# EAGLE board xr_vco_components_route2 (EAGLE 7.3.0)
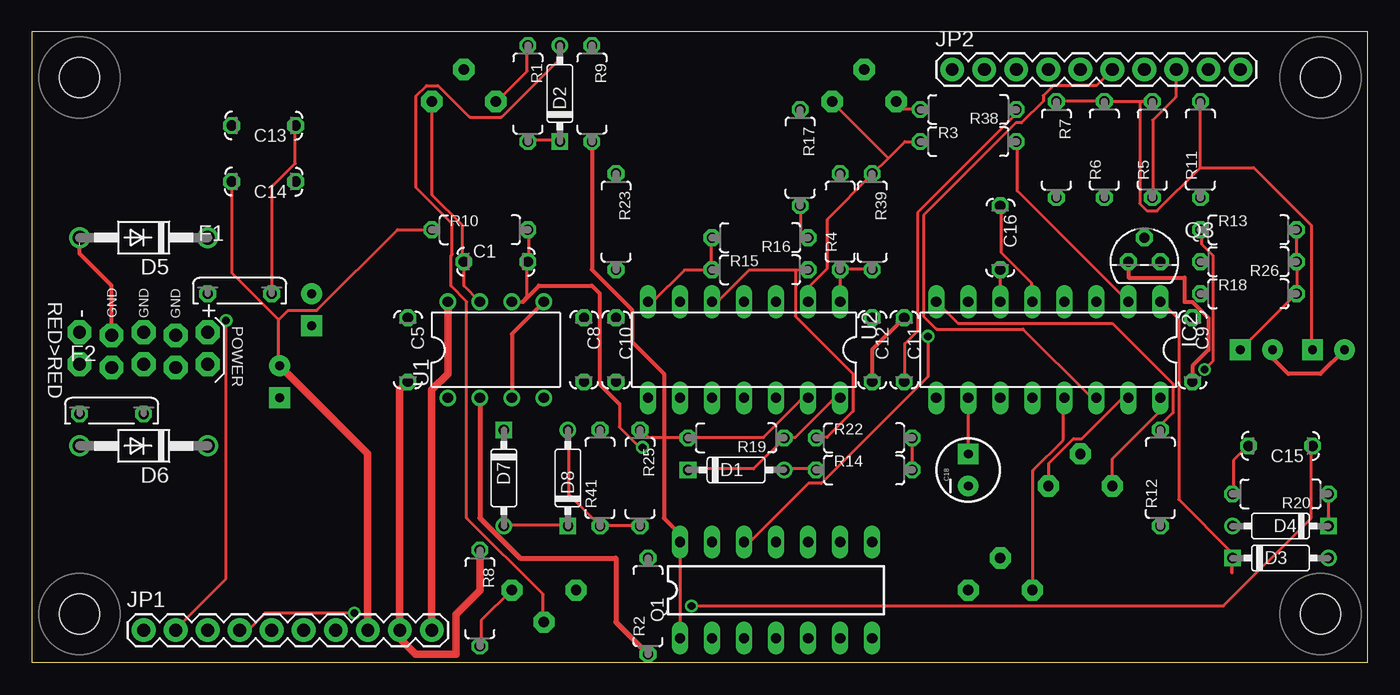
[diagram p0: board, top side]
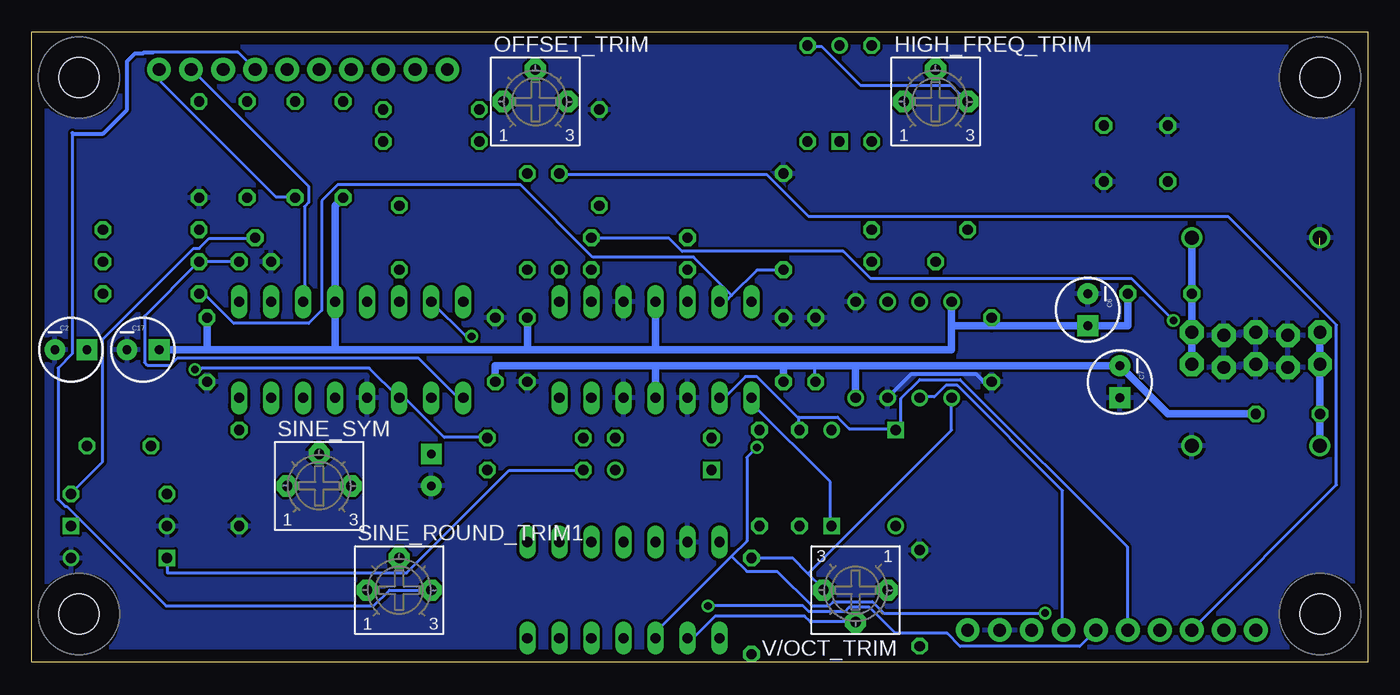
[diagram p1: board, bottom side, seen from below]

Size 106 x 50 mm. Coordinates in mm from the lower left corner, seen from the top.
Outline: 0,0 106,0 106,50 0,50 0,0
Copper layers (1*16): Top 0.035mm / dielectric 1.5mm / Bottom 0.035mm
Design rules "default": minimum track width 10mil, minimum drill 24mil, track to track 8mil, track to pad 8mil, pad to pad 8mil, via to via 8mil, smd to smd 8mil, copper to edge 40mil, drill to drill 8mil, minimum pad ring 10mil, minimum via ring 8mil, stop-mask expansion 4mil, vias tented up to drill 0mil, thermal gap 10mil
Net classes: 1 power: width 0.406 mm; 2 ground: width 0.305 mm

## Footprints (pad centres in the part's own frame; a part is rotated, then mirrored left to right if it is on the bottom)
C050-024X044 = drill 0.813 octagon: 1 -2.54,0; 2 2.54,0
CPOL-RADIAL-10UF-25V = drill 0.7 pad 1.651 square: 1 1.27,0 | drill 0.7 pad 1.651: 2 -1.27,0
DO35-7 = drill 0.813: A 3.81,0 | drill 0.813 square: C -3.81,0
DO41-10 = drill 1.118: A 5.08,0; C -5.08,0
C050H075X075 = drill 0.813 octagon: 1 -2.54,0; 2 2.54,0
BOURNS_3362P_TRIMMER = drill 0.813 pad 1.676 octagon: 1 -2.54,0; 2 0,2.54; 3 2.54,0
DIL16 = drill 0.813 long: 1 -8.89,-3.81; 2 -6.35,-3.81; 3 -3.81,-3.81; 4 -1.27,-3.81; 5 1.27,-3.81; 6 3.81,-3.81; 7 6.35,-3.81; 8 8.89,-3.81; 9 8.89,3.81; 10 6.35,3.81; 11 3.81,3.81; 12 1.27,3.81; 13 -1.27,3.81; 14 -3.81,3.81; 15 -6.35,3.81; 16 -8.89,3.81
1X10 = drill 1.016 pad 1.88: 1 0,0; 2 2.54,0; 3 5.08,0; 4 7.62,0; 5 10.16,0; 6 12.7,0; 7 15.24,0; 8 17.78,0; 9 20.32,0; 10 22.86,0
DIL14 = drill 0.813 long: 1 -7.62,-3.81; 2 -5.08,-3.81; 3 -2.54,-3.81; 4 0,-3.81; 5 2.54,-3.81; 6 5.08,-3.81; 7 7.62,-3.81; 8 7.62,3.81; 9 5.08,3.81; 10 2.54,3.81; 11 0,3.81; 12 -2.54,3.81; 13 -5.08,3.81; 14 -7.62,3.81
TO92D = drill 0.813 octagon: B 0,1.905; C 1.27,0; E -1.27,0
7MM_RESISTOR = drill 0.813 octagon: 1 -3.81,0; 2 3.81,0
EURO_PWR_HEADER_LOCK = drill 1.016 pad 1.88 octagon: GND1 -2.54,1.143; GND2 -2.54,-1.397; GND3 0,1.397; GND4 0,-1.143; GND5 2.54,1.143; GND6 2.54,-1.397; NEG1 -5.08,1.397; NEG2 -5.08,-1.143; POS1 5.08,1.397; POS2 5.08,-1.143
DIL08 = drill 0.813 pad 1.27: 1 -3.81,-3.81; 2 -1.27,-3.81; 3 1.27,-3.81; 4 3.81,-3.81; 5 3.81,3.81; 6 1.27,3.81; 7 -1.27,3.81; 8 -3.81,3.81
MOUNTING_HOLE = hole 3.2: 0,0

## Placement (x,y rotation side)
C1  100pf  [C050-024X044]  36.83,31.75 0 top
C2  10uf  [CPOL-RADIAL-10UF-25V]  102.87,24.77 0 bottom
C5  100n  [C050-024X044]  29.84,24.77 270 top
C6  10uf  [CPOL-RADIAL-10UF-25V]  22.23,27.94 270 bottom
C7  10uf  [CPOL-RADIAL-10UF-25V]  19.68,22.23 270 bottom
C8  100n  [C050-024X044]  43.81,24.77 270 top
C9  100n  [C050-024X044]  92.08,24.77 270 top
C10  100n  [C050-024X044]  46.35,24.77 270 top
C11  100n  [C050-024X044]  69.22,24.77 270 top
C12  100n  [C050-024X044]  66.67,24.77 270 top
C13  100n  [C050-024X044]  18.41,42.55 180 top
C14  100n  [C050-024X044]  18.41,38.1 180 top
C15  470pf  [C050-024X044]  99.06,17.14 180 top
C16  0.047uf  [C050-024X044]  76.83,33.66 270 top
C17  4.7uf  [CPOL-RADIAL-10UF-25V]  97.16,24.77 0 bottom
C18  4.7uf  [CPOL-RADIAL-10UF-25V]  74.3,15.24 90 top
D1  1N4148  [DO35-7]  55.88,15.24 0 top
D2  1N4148  [DO35-7]  41.91,45.09 90 top
D3  1N4148  [DO35-7]  99.06,8.26 0 top
D4  1N4148  [DO35-7]  99.06,10.79 180 top
D5  1N4001  [DO41-10]  8.89,33.66 180 top
D6  1N4001  [DO41-10]  8.89,17.14 180 top
D7  1N4148  [DO35-7]  37.47,14.61 270 top
D8  1N4148  [DO35-7]  42.55,14.61 90 top
F1  FUSE  [C050H075X075]  16.51,29.21 0 top
F2  FUSE  [C050H075X075]  6.35,19.68 0 top
HIGH_FREQ_TRIM  1M  [BOURNS_3362P_TRIMMER]  34.29,44.45 0 bottom
IC2  [DIL16]  80.64,24.77 180 top
JP1  M10"  [1X10]  8.89,2.54 0 top
JP2  M10"  [1X10]  73.03,46.99 0 top
OFFSET_TRIM  50k  [BOURNS_3362P_TRIMMER]  66.04,44.45 0 bottom
Q1  THAT300P  [DIL14]  59.05,5.71 0 top
Q3  2N3904  [TO92D]  88.27,31.75 0 top
R1  47k  [7MM_RESISTOR]  39.37,45.09 270 top
R2  2k  [7MM_RESISTOR]  48.9,4.45 90 top
R3  82k  [7MM_RESISTOR]  74.3,41.27 0 top
R4  1k  [7MM_RESISTOR]  64.14,34.92 90 top
R5  11k  [7MM_RESISTOR]  88.9,40.64 90 top
R6  20k  [7MM_RESISTOR]  85.09,40.64 90 top
R7  5.6k  [7MM_RESISTOR]  81.28,40.64 270 top
R8  390R  [7MM_RESISTOR]  35.56,5.08 270 top
R9  4.7k  [7MM_RESISTOR]  44.45,45.09 270 top
R10  1.2m  [7MM_RESISTOR]  35.56,34.29 0 top
R11  5.6k  [7MM_RESISTOR]  92.71,40.64 90 top
R12  1k  [7MM_RESISTOR]  89.53,14.61 90 top
R13  4.7k  [7MM_RESISTOR]  96.52,34.29 0 top
R14  10k  [7MM_RESISTOR]  66.04,15.24 0 top
R15  2.2M  [7MM_RESISTOR]  57.78,31.11 0 top
R16  3k  [7MM_RESISTOR]  57.78,33.66 180 top
R17  1.8k  [7MM_RESISTOR]  60.96,40.01 270 top
R18  10k  [7MM_RESISTOR]  96.52,29.21 0 top
R19  10k  [7MM_RESISTOR]  55.88,17.78 180 top
R20  100k  [7MM_RESISTOR]  99.06,13.34 180 top
R22  2.2k  [7MM_RESISTOR]  66.04,17.78 0 top
R23  10k  [7MM_RESISTOR]  46.35,34.92 270 top
R25  10k  [7MM_RESISTOR]  48.26,14.61 270 top
R26  4.7k  [7MM_RESISTOR]  96.52,31.75 180 top
R38  150k  [7MM_RESISTOR]  74.3,43.81 180 top
R39  200k  [7MM_RESISTOR]  66.67,34.92 270 top
R41  220k  [7MM_RESISTOR]  45.09,14.61 90 top
SINE_ROUND_TRIM1  500 Ohm  [BOURNS_3362P_TRIMMER]  76.83,5.71 0 bottom
SINE_SYM  25k  [BOURNS_3362P_TRIMMER]  83.19,13.97 0 bottom
SV1  EURO_POWER_HEADERLOCK_PADS  [EURO_PWR_HEADER_LOCK]  8.89,24.77 0 top
U1  LF442N  [DIL08]  36.83,24.77 0 top
U2  TL074P  [DIL14]  56.52,24.77 180 top
U$1  [MOUNTING_HOLE]  3.81,46.35 0 top
U$2  [MOUNTING_HOLE]  102.23,46.35 0 top
U$3  [MOUNTING_HOLE]  102.23,3.81 0 top
U$4  [MOUNTING_HOLE]  3.81,3.81 0 top
V/OCT_TRIM  100R  [BOURNS_3362P_TRIMMER]  40.64,5.71 180 bottom

## Library data of the parts
C1 C5 C8-C16 F1 F2 = TomW
C2 C6 C7 C17 C18 = SparkFun-Passives
D1-D4 D7 D8 HIGH_FREQ_TRIM OFFSET_TRIM R1-R20 R22 R23 R25 R26 R38 R39 R41 SINE_ROUND_TRIM1 SINE_SYM SV1 U$1-U$4 V/OCT_TRIM = MusicThingModular
D5 D6 = diode
IC2 = exar; OC_FARNELL: unknown; OC_NEWARK: unknown
JP1 JP2 = SparkFun-Connectors
Q1 = that-corp
Q3 = transistor-small-signal
U1 U2 = linear

## Nets
+12V: C5.1 C6.1 C9.1 C12.1 C13.1 C17.1 F1.2 IC2.4 JP1.10 R7.2 R13.2 R18.2 R26.1 U1.8 U2.4
+12V_INLET [power]: D5.C F1.1 SV1.POS1 SV1.POS2
-12V: C7.2 C8.2 C10.2 C11.2 C14.2 F2.2 JP1.8 R10.1 R38.1 U1.4 U2.11
-12V_INLET [power]: D6.A F2.1 SV1.NEG1 SV1.NEG2
CATH_D4: D1.C R19.1 U2.14
GND: C2.2 C5.2 C6.2 C7.1 C8.1 C9.2 C10.1 C11.1 C12.2 C13.2 C14.1 C17.2 C18.2 D3.A D4.A D5.A D6.C IC2.12 JP1.9 Q1.13 Q3.E R8.1 R11.1 R12.1 R17.1 R23.1 SINE_SYM.2 SV1.GND1 SV1.GND2 SV1.GND3 SV1.GND4 SV1.GND5 SV1.GND6 U1.3 U1.5 U2.3 U2.10 U2.12
LIN_FM_CV: C1.2 JP1.4 Q1.3 R10.2 U1.6
N$1: IC2.7 Q1.12
N$2: D2.C R1.2
N$3: HIGH_FREQ_TRIM.1 R1.1
N$5: IC2.2 R3.2
N$7: R2.2 U1.1 V/OCT_TRIM.3
N$8: OFFSET_TRIM.3 R3.1 R39.1 U2.2
N$9: R8.2 V/OCT_TRIM.1
N$10: D2.A Q1.2 V/OCT_TRIM.2
N$11: Q1.1 Q1.14 R9.2
N$12: OFFSET_TRIM.1 R38.2
N$13: R4.1 R39.2 U2.1
N$15: C1.1 HIGH_FREQ_TRIM.3 R9.1 U1.7
N$16: C2.1 R5.2 R6.2 R7.1 R11.2
N$17: IC2.16 SINE_SYM.1
N$20: IC2.13 SINE_ROUND_TRIM1.1
N$21: IC2.15 SINE_SYM.3
N$22: IC2.8 R12.2
N$23: R18.1 R23.2 U2.6
N$24: R15.1 R16.2 U2.7
N$25: R19.2 R25.1 U2.13
N$26: R15.2 R22.1 U2.5
N$27: D1.A D3.C IC2.1 R14.1
N$28: C15.2 R20.2
N$29: D4.C Q3.B R20.1
N$30: IC2.11 R13.1 R14.2 R22.2
N$31: IC2.9 Q3.C R26.2
N$32: C16.2 IC2.6
N$33: C16.1 IC2.5
N$34: C18.1 IC2.10
N$35: D7.A D8.C U2.8
N$36: D8.A R25.2 R41.1
PITCH_CV: JP1.7 R2.1 U1.2
SINE_TRI_OUT: JP1.3 R4.2
SKEW_IN: D7.C JP1.5 R41.2 U2.9
SQR_OUT: JP1.2 R16.1 R17.2
SW_1: JP2.10 R6.1
SW_2: IC2.3 JP2.9
SW_3: JP2.8 R5.1
SW_4: JP2.7 SINE_ROUND_TRIM1.3
SW_5: IC2.14 JP2.6
SYNC_IN: C15.1 JP1.6

## Tracks (layer width: path | path; a pad name or v marks a point on that pad's centre or on a via)
+12V
  Top 0.254: R13.2 100.36,34.29 100.36,31.77 R26.1 100.36,31.66 100.36,29.26 R18.2 100.24,29.15 95.9,24.8 C17.1 | C13.1 20.92,42.52 20.92,39.55 19.09,37.72 19.09,29.26 F1.2
  Top 0.61: JP1.10 31.75,21.59 33.02,22.86 U1.8
  Bottom 0.61: F1.2 19.05,26.67 C6.1 29.84,26.67 | C5.1 29.84,26.67 | 29.84,26.67 33.02,26.67 | U1.8 33.02,26.67 | 33.02,26.67 33.02,24.77 56.52,24.77 | 56.52,24.77 U2.4 | 56.52,24.77 66.67,24.77 | C12.1 66.67,24.77 | 66.67,24.77 81.92,24.77 | 81.92,24.77 IC2.4 81.92,36.2 R7.2 | C9.1 92.08,24.77 | 92.08,24.77 81.92,24.77 | C17.1 92.08,24.77
+12V_INLET
  Bottom 0.61: SV1.POS2 SV1.POS1 F1.1 D5.C
-12V
  Top 0.254: 19.55,27.2 19.55,23.77 C7.2 | 19.55,27.2 15.89,30.86 15.89,38.06 C14.2 | R10.1 29.03,34.29 22.63,27.89 20.34,27.89 19.66,27.2 19.55,27.2 | R38.1 78.07,43.78 78.07,43.43 70.29,35.66 70.29,26.29 69.27,25.26 69.27,22.29 C11.2
  Top 0.61: JP1.8 26.67,16.51 C7.2
  Bottom 0.254: 43.89,23.5 43.89,22.29 C8.2
  Bottom 0.61: F2.2 15.88,19.68 C7.2 40.64,23.5 | 40.64,23.5 U1.4 | 40.64,23.5 43.89,23.5 46.35,23.5 | C10.2 46.35,23.5 | 56.52,23.5 46.35,23.5 | U2.11 56.52,23.5 | 56.52,23.5 69.22,23.5 C11.2
-12V_INLET
  Bottom 0.61: SV1.NEG1 SV1.NEG2 F2.1 D6.A
CATH_D4
  Top 0.254: D1.C 52.12,15.32 57.26,15.32 59.66,17.72 R19.1 59.78,17.83 60.58,17.83 63.66,20.92 64.12,20.92 U2.14
GND  (1 unrouted)
  Top 0.305: Q3.E 87,30.48 91.44,30.48 91.44,28.57 92.08,28.57 93.34,27.3 93.34,24.77 92.08,23.5 C9.2 | C2.2 102.23,22.86 99.69,22.86 98.42,24.13 C17.2 | SV1.GND1 6.35,29.84 3.81,32.38 3.81,33.02 | C11.1 66.67,24.77 C12.2 | U1.5 38.1,26.04 U1.3
  Top 0.61: C5.2 29.21,21.59 JP1.9 29.21,1.91 30.48,0.64 33.66,0.64 33.66,3.81 35.56,5.71 R8.1
  Bottom 0.305: U1.3 36.2,22.86 31.11,22.86 30.48,22.23 C5.2
  pour Bottom: -0.64,50.8 -0.64,-0.64 106.68,-0.64 106.68,0 106.68,50.8
LIN_FM_CV  (via drill 0.61)
  Top 0.254: R10.2 39.43,33.72 39.43,31.77 C1.2 39.32,31.66 39.32,29.03 38.98,28.69 38.98,28.57 U1.6 | v48.46,17.03 48.23,17.03 46.63,18.63 46.63,20.46 | v25.6,3.89 18.52,3.89 17.26,2.63 16.57,2.63 JP1.4
  Top 0.305: 38.98,28.57 40.25,29.84 44.45,29.84 45.09,29.21 45.09,22.01 46.63,20.46
  Bottom 0.254: 50.46,8.4 49.26,9.6 49.26,16.23 v48.46,17.03 | 50.46,8.4 56.46,2.4 56.46,1.94 Q1.3 | v25.6,3.89 38.41,3.89 39.32,4.8 42.41,4.8 42.75,4.46 44.12,4.46 46.86,7.2 49.26,7.2 50.46,8.4
N$1  (via drill 0.61)
  Top 0.254: v71.09,25.83 71.09,22.63 62.64,14.17 61.61,14.17 57.04,9.6 56.58,9.6 Q1.12
  Bottom 0.254: v71.09,25.83 71.55,25.83 IC2.7
N$2
  Top 0.254: R1.2 39.43,41.38 41.83,41.38 D2.C
N$3
  Top 0.254: R1.1 39.32,48.81 39.32,46.86 36.92,44.46 HIGH_FREQ_TRIM.1
N$5
  Top 0.254: R3.2 78.18,41.26 78.18,37.38 IC2.2
N$7
  Bottom 0.254: 44.41,7.03 43.2,5.83 V/OCT_TRIM.3 | 44.41,7.03 45.61,8.23 48.81,8.23 R2.2 | 44.41,7.03 33.03,18.4 33.03,20.92 U1.1
N$8
  Top 0.254: U2.2 61.61,28.57 61.61,29.72 63.09,31.2 63.09,35.09 66.64,38.63 R39.1 66.75,38.75 67.95,39.95 | 67.95,39.95 69.27,41.26 70.41,41.26 R3.1 | 67.95,39.95 63.55,44.35 OFFSET_TRIM.3
N$9
  Top 0.254: R8.2 35.66,1.37 35.66,3.31 38.06,5.71 V/OCT_TRIM.1
N$10
  Top 0.254: D2.A 41.83,48.81 41.83,47.78 37.26,43.2 34.75,43.2 32.23,45.72 31.32,45.72 30.52,44.92 30.52,37.6 33.38,34.75 33.38,32.35 33.26,32.23 33.26,29.83 34.52,28.57 34.52,11.43 40.58,5.37 40.58,3.2 V/OCT_TRIM.2
  Bottom 0.254: Q1.2 53.95,1.94 53.49,1.94 51.78,3.66 44.69,3.66 44.23,3.2 40.69,3.2 V/OCT_TRIM.2
N$11
  Top 0.254: Q1.1 Q1.14 51.44,9.6 | 44.35,40.69 44.35,41.26 R9.2
  Top 0.305: 44.35,40.69 44.45,40.59 44.45,31.11 47.62,27.94 47.62,25.4 50.16,22.86 50.16,11.43 51.44,10.16 Q1.14
N$12
  Top 0.254: R38.2 70.41,43.89 69.04,43.89 68.58,44.35 OFFSET_TRIM.1
N$13
  Top 0.254: U2.1 64.12,28.57 64.12,31.09 R4.1 64.24,31.2 66.64,31.2 R39.2
N$15
  Top 0.254: U1.7 35.55,28.57 34.29,29.83 C1.1 34.18,31.77 34.18,34.63 31.77,37.03 31.77,44.35 HIGH_FREQ_TRIM.3
  Bottom 0.254: R9.1 44.35,48.81 43.32,48.81 40.23,45.72 33.03,45.72 31.77,44.46 HIGH_FREQ_TRIM.3
N$16
  Top 0.254: R7.1 81.38,44.46 85.04,44.46 R6.2 85.15,44.46 87.9,44.46 | 87.9,44.46 88.81,44.46 R5.2 | 92.7,39.2 92.7,44.35 R11.2 | 92.7,39.2 89.27,35.78 88.47,35.78 87.9,36.35 87.9,44.46 | 92.7,39.2 96.93,39.2 101.5,34.63 101.5,24.8 C2.1
N$17
  Top 0.254: SINE_SYM.1 85.72,16.12 89.5,19.89 89.5,20.92 IC2.16
N$20
  Top 0.254: IC2.13 81.84,20.92 81.84,17.6 79.44,15.2 79.44,5.71 SINE_ROUND_TRIM1.1
N$21
  Top 0.254: IC2.15 86.98,20.92 86.53,20.92 83.33,17.72 82.64,17.72 80.7,15.77 80.7,14.06 SINE_SYM.3
N$22
  Top 0.254: R12.2 89.61,18.52 89.61,18.86 90.53,19.77 90.53,22.06 85.72,26.86 73.5,26.86 71.78,28.57 IC2.8
N$23
  Bottom 0.254: U2.6 50.98,28.57 50.46,29.09 | 50.46,29.09 48.46,31.09 46.41,31.09 R23.2 | 50.46,29.09 53.49,32.12 61.49,32.12 67.21,37.83 81.72,37.83 82.98,36.58 82.98,27.89 84.01,26.86 89.95,26.86 92.24,29.15 92.7,29.15 R18.1
N$24
  Top 0.254: U2.7 49.26,28.57 51.78,31.09 53.95,31.09 R15.1 53.95,31.2 53.95,33.6 R16.2
N$25
  Top 0.254: R25.1 48.35,18.4 48.92,17.83 52.01,17.83 R19.2 52.12,17.83 58.06,17.83 61.15,20.92 61.49,20.92 U2.13
N$26
  Top 0.254: U2.5 54.41,28.57 56.92,31.09 60.58,31.09 | 60.58,31.09 61.49,31.09 R15.2 | 60.58,31.09 60.58,27.43 65.15,22.86 65.15,19.89 63.09,17.83 62.29,17.83 R22.1
N$27
  Top 0.254: D1.A 59.78,15.32 62.18,15.32 R14.1 | D3.C 95.21,7.09 95.21,8.69 90.98,12.92 90.98,27.2 89.61,28.57 IC2.1
  Bottom 0.254: R14.1 62.29,15.2 68.12,15.2 76.24,7.09 95.21,7.09 D3.C
N$28
  Top 0.254: R20.2 95.33,13.37 95.33,16 96.47,17.14 C15.2
N$29
  Top 0.254: 88.24,33.72 Q3.B | R20.1 D4.C
  Bottom 0.254: Q3.B 88.35,33.6 91.9,33.6 92.7,32.8 93.15,32.8 100.36,25.6 100.36,15.89 102.87,13.37 R20.1
N$30  (via drill 0.61)
  Top 0.254: R14.2 69.84,15.32 69.84,17.72 R22.2 | v93.04,23.2 93.73,23.89 93.73,32.23 92.81,33.15 92.81,34.29 R13.1
  Bottom 0.254: R22.2 69.95,17.83 73.27,17.83 76.35,20.92 76.81,20.92 IC2.11 76.92,21.03 79.21,23.32 92.47,23.32 92.58,23.2 v93.04,23.2
N$31
  Bottom 0.254: IC2.9 71.78,21.03 72.24,21.03 75.32,24.12 94.41,24.12 94.98,23.55 96.81,23.55 97.04,23.77 97.04,27.43 92.81,31.66 R26.2 92.58,31.77 89.61,31.77 Q3.C
N$32
  Top 0.254: IC2.6 76.81,28.57 76.81,31.09 C16.2
N$33
  Top 0.254: C16.1 76.92,36.12 76.92,32.46 79.32,30.06 79.32,28.57 IC2.5
N$34
  Top 0.254: C18.1 IC2.10
N$35
  Top 0.254: D7.A 37.49,10.86 42.52,10.86 D8.C
  Bottom 0.254: U2.8 48.81,20.92 48.81,20.46 42.63,14.29 42.63,10.86 D8.C
N$36
  Top 0.254: D8.A 42.63,18.4 42.63,13.26 45.03,10.86 R41.1 45.15,10.86 48.23,10.86 R25.2
PITCH_CV
  Top 0.406: U1.2 35.56,11.43 38.73,8.26 46.35,8.26 46.35,3.17 R2.1
  Bottom 0.254: U1.2 35.55,21.03 34.4,21.03 33.49,21.95 32.58,21.95 24.23,13.6 24.23,2.63 JP1.7
SINE_TRI_OUT
  Bottom 0.254: R4.2 64.12,38.63 47.66,38.63 44.35,35.32 11.09,35.32 2.52,26.75 2.52,14.06 13.95,2.63 JP1.3
SKEW_IN
  Bottom 0.254: 45.15,19.32 48.46,22.63 49.38,22.63 50.98,21.03 51.44,21.03 U2.9 | 45.15,19.32 45.15,18.52 R41.2 | 45.15,19.32 45.15,19.43 42.06,19.43 41.15,18.52 37.49,18.52 D7.C 37.49,18.63 37.03,19.09 37.03,20.92 35.55,22.4 32.35,22.4 19.09,9.14 19.09,2.63 JP1.5
SQR_OUT  (via drill 0.61)
  Top 0.254: R17.2 61.04,36.12 61.04,34.18 61.49,33.72 R16.1 | v15.43,27.09 15.43,6.63 11.43,2.63 JP1.2
  Bottom 0.254: v15.43,27.09 18.75,30.4 39.43,30.4 41.6,32.58 54.41,32.58 55.44,33.6 61.49,33.6 R16.1
SW_1
  Bottom 0.254: R6.1 85.15,36.92 86.64,36.92 95.78,46.06 95.78,46.98 JP2.10
SW_2
  Bottom 0.254: IC2.3 84.35,28.57 84.35,36.12 84.01,36.46 84.01,37.72 93.27,46.98 JP2.9
SW_3
  Top 0.254: R5.1 88.92,36.92 88.92,42.98 90.75,44.81 90.75,46.98 JP2.8
SW_4
  Bottom 0.254: SINE_ROUND_TRIM1.3 77.61,5.71 78.87,4.46 95.33,4.46 103.21,12.34 103.33,12.34 103.9,12.92 103.9,23.32 102.76,24.46 102.76,41.95 | 96.36,48.35 89.61,48.35 88.35,47.09 JP2.7
  Bottom 0.305: 102.76,41.95 102.72,41.91 100.33,41.91 98.42,43.81 98.42,47.62 97.79,48.26 97.16,48.26 97.07,48.35 96.36,48.35
SW_5
  Top 0.254: IC2.14 84.35,21.03 84.01,21.03 78.64,26.4 71.78,26.4 70.75,27.43 70.75,35.43 78.07,42.75 78.52,42.75 80.24,44.46 80.24,44.92 81.04,45.72 84.47,45.72 85.72,46.98 JP2.6
SYNC_IN  (via drill 0.61)
  Top 0.254: v52.35,4.46 94.53,4.46 101.5,11.43 101.5,17.14 C15.1
  Bottom 0.254: v52.35,4.46 44.81,4.46 44.35,4 41.49,4 41.15,4.34 39.55,4.34 37.49,2.29 33.38,2.29 32.35,1.26 22.86,1.26 21.6,2.52 JP1.6